# EAGLE board 10MCLK02 (EAGLE 6.2)
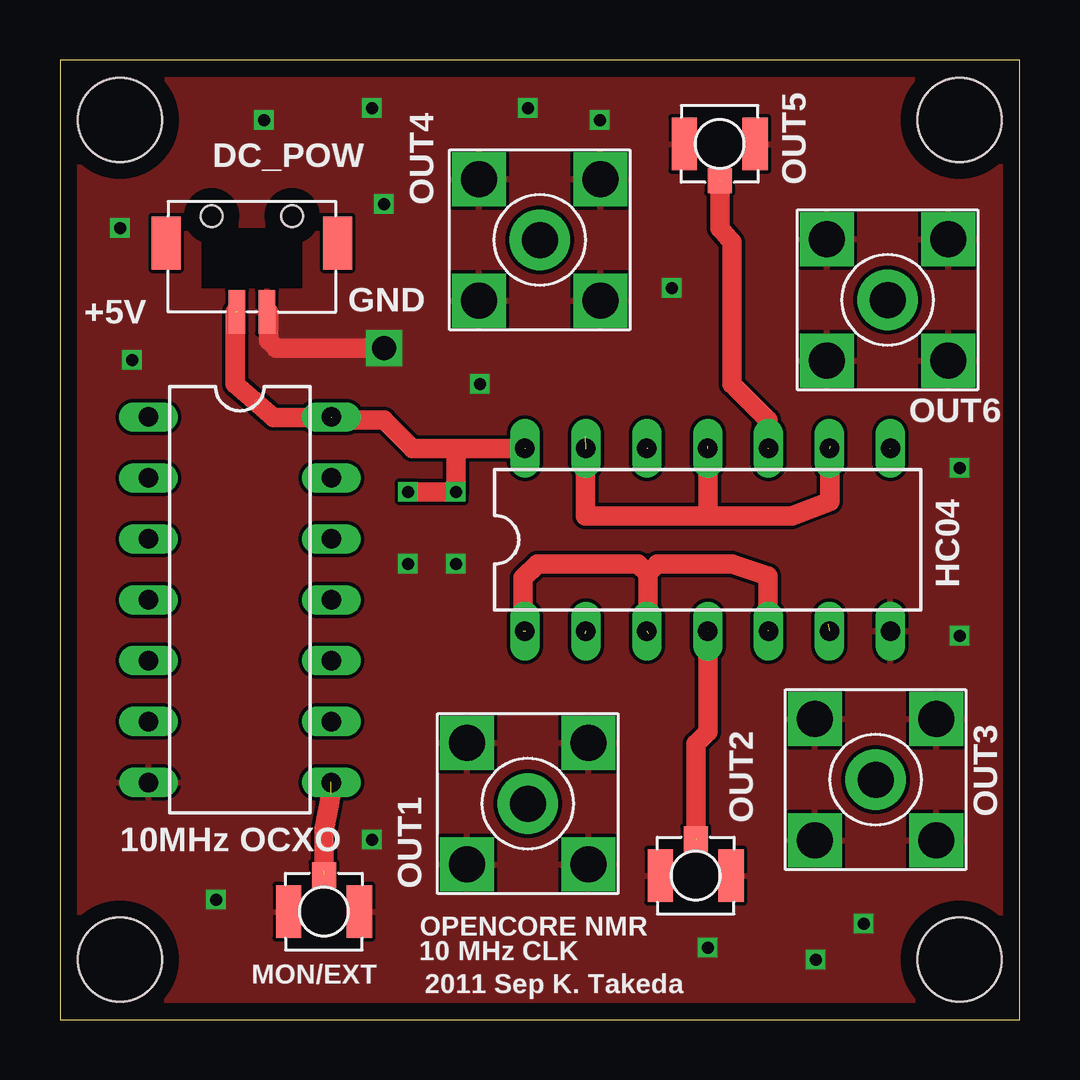
[diagram p0: board, top side]
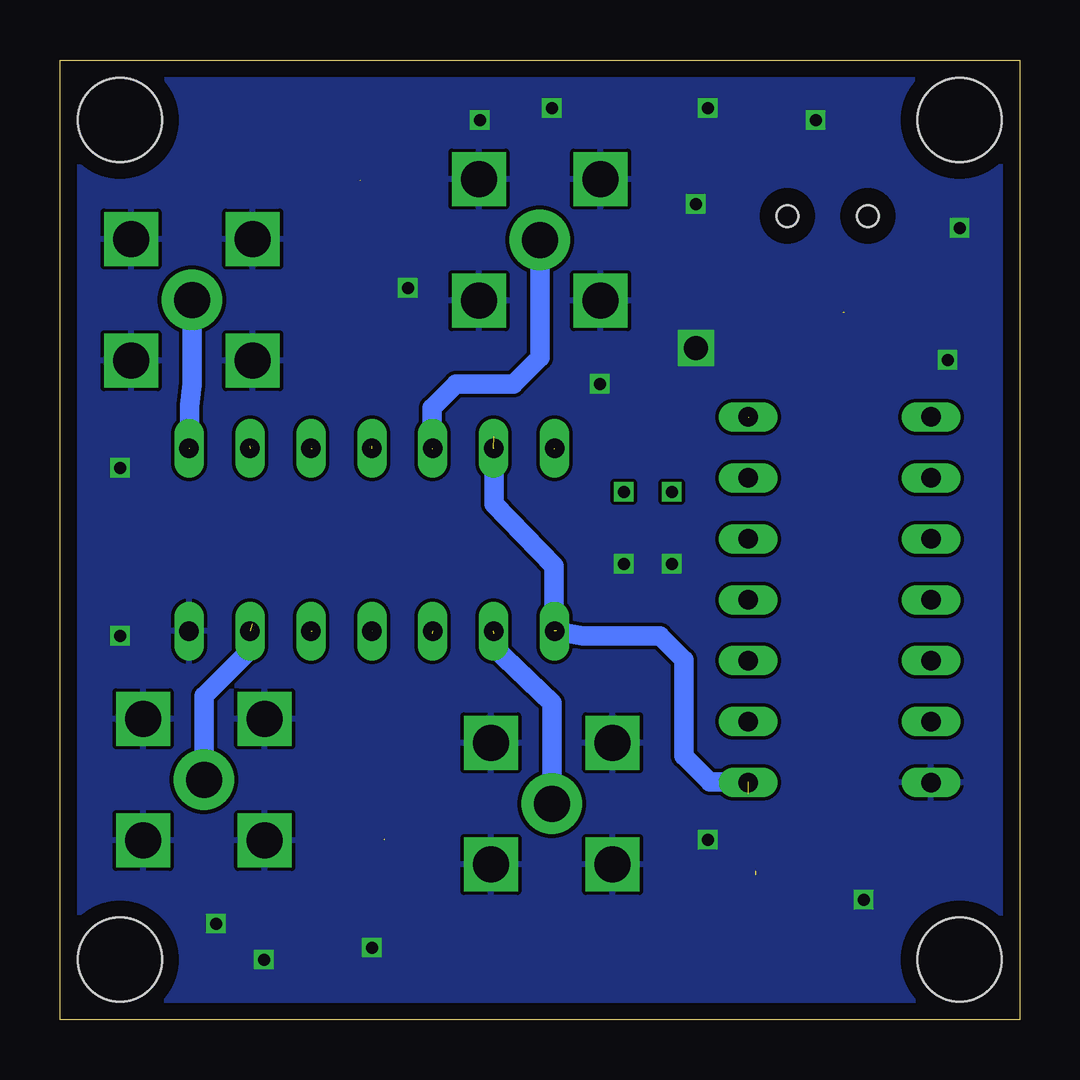
[diagram p1: board, bottom side, seen from below]

Size 40 x 40 mm. Coordinates in mm from the lower left corner, seen from the top.
Outline: 0,0 40,0 40,40 0,40 0,0
Copper layers (1*16): Top 0.035mm / dielectric 1.5mm / Bottom 0.035mm
Design rules: minimum track width 0.15mm, minimum drill 0.3mm, track to track 0.15mm, track to pad 0.15mm, pad to pad 0.15mm, via to via 0.15mm, smd to smd 0.15mm, copper to edge 0.7mm, drill to drill 0.45mm, minimum pad ring 0.15mm, minimum via ring 0.15mm, stop-mask expansion 4mil, vias tented up to drill 0mil, thermal gap 0.15mm
Holes 3.5 mm at 2.5,2.5 37.5,2.5 37.5,37.5 2.5,37.5

## Footprints (pad centres in the part's own frame; a part is rotated, then mirrored left to right if it is on the bottom)
DIL14 = drill 0.813 long: 1 -7.62,-3.81; 2 -5.08,-3.81; 3 -2.54,-3.81; 4 0,-3.81; 5 2.54,-3.81; 6 5.08,-3.81; 7 7.62,-3.81; 8 7.62,3.81; 9 5.08,3.81; 10 2.54,3.81; 11 0,3.81; 12 -2.54,3.81; 13 -5.08,3.81; 14 -7.62,3.81
DF13-2P-12.5V = smd 0.7 x 1.8: 1 -0.625,4; 2 0.625,4 | smd 1.2 x 2.2: 3 -3.575,1.13; 4 3.575,1.13 | hole 0.9: -1.675,0; 1.675,0
U.FL-R-SMT = smd 1 x 1.05: P$1 0,1.525 | smd 1.05 x 2.2: P$2 1.475,0; P$3 -1.475,0
SMA_STRAIGHT = drill 1.5 pad 2.54: 1 0,0 | drill 1.5 square: 2 -2.54,2.54; 3 2.54,2.54; 4 -2.54,-2.54; 5 2.54,-2.54

## Placement (x,y rotation side)
10MCLK  [DIL14]  7.5,17.5 270 top
DC_POW  [DF13-2P-12.5V]  8,33.5 180 top
E$2  [DIL14]  27,20 0 top
E$10  [U.FL-R-SMT]  26.5,6 0 top
E$11  [U.FL-R-SMT]  27.5,36.5 180 top
MON/EXT  [U.FL-R-SMT]  11,4.5 0 top
OUT1  [SMA_STRAIGHT]  19.5,9 0 top
OUT3  [SMA_STRAIGHT]  34,10 0 top
OUT4  [SMA_STRAIGHT]  20,32.5 0 top
OUT6  [SMA_STRAIGHT]  34.5,30 0 top

## Library data of the parts
10MCLK E$2 = 74ttl-din
DC_POW E$10 E$11 MON/EXT = HIROSE
OUT1 OUT3 OUT4 OUT6 = connector

## Nets
10IN: 10MCLK.8 E$2.1 E$2.3 E$2.5 E$2.9 E$2.11 E$2.13 MON/EXT.P$1
+5V: 10MCLK.14 DC_POW.2 E$2.14
GND: 10MCLK.7 DC_POW.1 E$2.7 E$10.P$2 E$10.P$3 E$11.P$2 E$11.P$3 MON/EXT.P$2 MON/EXT.P$3 OUT1.2 OUT1.3 OUT1.4 OUT1.5 OUT3.2 OUT3.3 OUT3.4 OUT3.5 OUT4.2 OUT4.3 OUT4.4 OUT4.5 OUT6.2 OUT6.3 OUT6.4 OUT6.5
S$2: E$2.4 E$10.P$1
S$5: E$2.10 E$11.P$1
S$7: E$2.12 OUT4.1
S$8: E$2.8 OUT6.1
S$9: E$2.2 OUT1.1
S$10: E$2.6 OUT3.1

## Tracks (layer width: path | path; a pad name or v marks a point on that pad's centre or on a via)
10IN  (11 unrouted)
  Top 0.813: 19.3,16.2 19.3,18.4 19.9,19 24.1,19 24.5,18.6 | 24.5,18.6 24.9,19 28,19 29.5,18.5 29.5,16.2 | 24.5,18.6 24.5,16.1 | 27,21 27,21.5 | 27,21 26.5,21 | 27,21 30.5,21 32.1,21.6 32.1,23.9 | 21.9,24.3 21.9,21 27,21 | 27,21 27,23.9 | 11.3,9.4 11,7.9 11,6.2
  Bottom 0.813: 11.3,9.9 12.9,9.9 14,11 14,15 15,16 18.2,16 19.4,16.2 19.4,18.9 21.9,21.5 21.9,23.8
+5V  (via drill 0.5)  (3 unrouted)
  Top 0.813: 16.5,23.8 19.4,23.8 | 7.3,29.5 7.3,26.5 8.9,25.1 11.3,25.1 11.4,25 13.5,25 14.7,23.8 16.5,23.8 | v14.5,22 v16.5,22 16.5,23.8
GND  (via drill 0.5, 1)
  Top 0.813: 8.7,29.5 8.7,28.3 9,28 v13.5,28
  other vias: 14.5,19 16.5,19 8.5,37.5 13,38 13.5,34 19.5,38 22.5,37.5 25.5,30.5 17.5,26.5 3,27.5 2.5,33 6.5,5 31.5,2.5 33.5,4 27,3 13,7.5 37.5,23 37.5,16
  pour Bottom: 0,0 40,0 40,40 0,40
  pour Top: 0,0 40,0 40,40 0,40
S$2  (2 unrouted)
  Top 0.813: E$2.4 27,12 26.5,11.5 26.5,7.5
S$5  (2 unrouted)
  Top 0.813: 29.5,23.8 29.5,25 28,26.5 28,32.4 27.5,33 27.5,35
S$7  (1 unrouted)
  Bottom 0.813: 24.5,23.8 24.5,25.5 23.5,26.5 21.1,26.5 20,27.6 OUT4.1
S$8  (1 unrouted)
  Bottom 0.813: 34.6,23.8 34.6,25.6 34.5,26.5 OUT6.1
S$9  (1 unrouted)
  Bottom 0.813: 21.9,16.1 22,15.6 19.5,13.2 OUT1.1
S$10  (1 unrouted)
  Bottom 0.813: 32,16.5 32,15.5 34,13.5 OUT3.1

## Text on the board
tPlace: OUT5 | GND | +5V | HC04 | OUT2 | 10MHz OCXO | OPENCORE NMR | 10 MHz CLK | 2011 Sep K. Takeda